# EAGLE board PCB.Board (EAGLE 9.6.2)
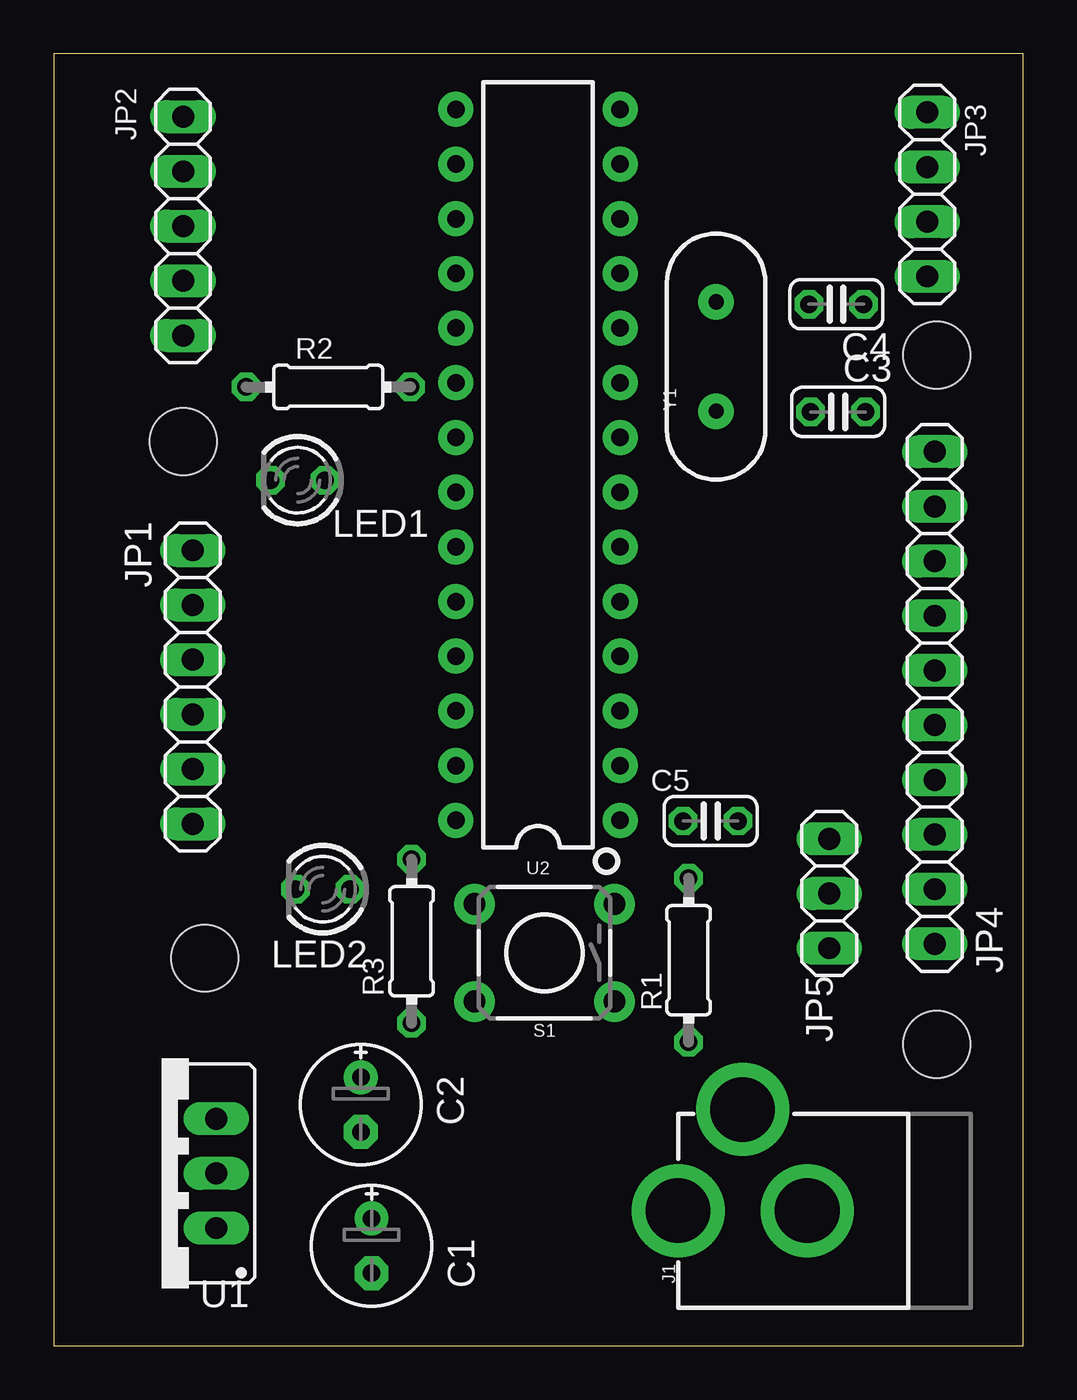
[diagram p0: board, top side]
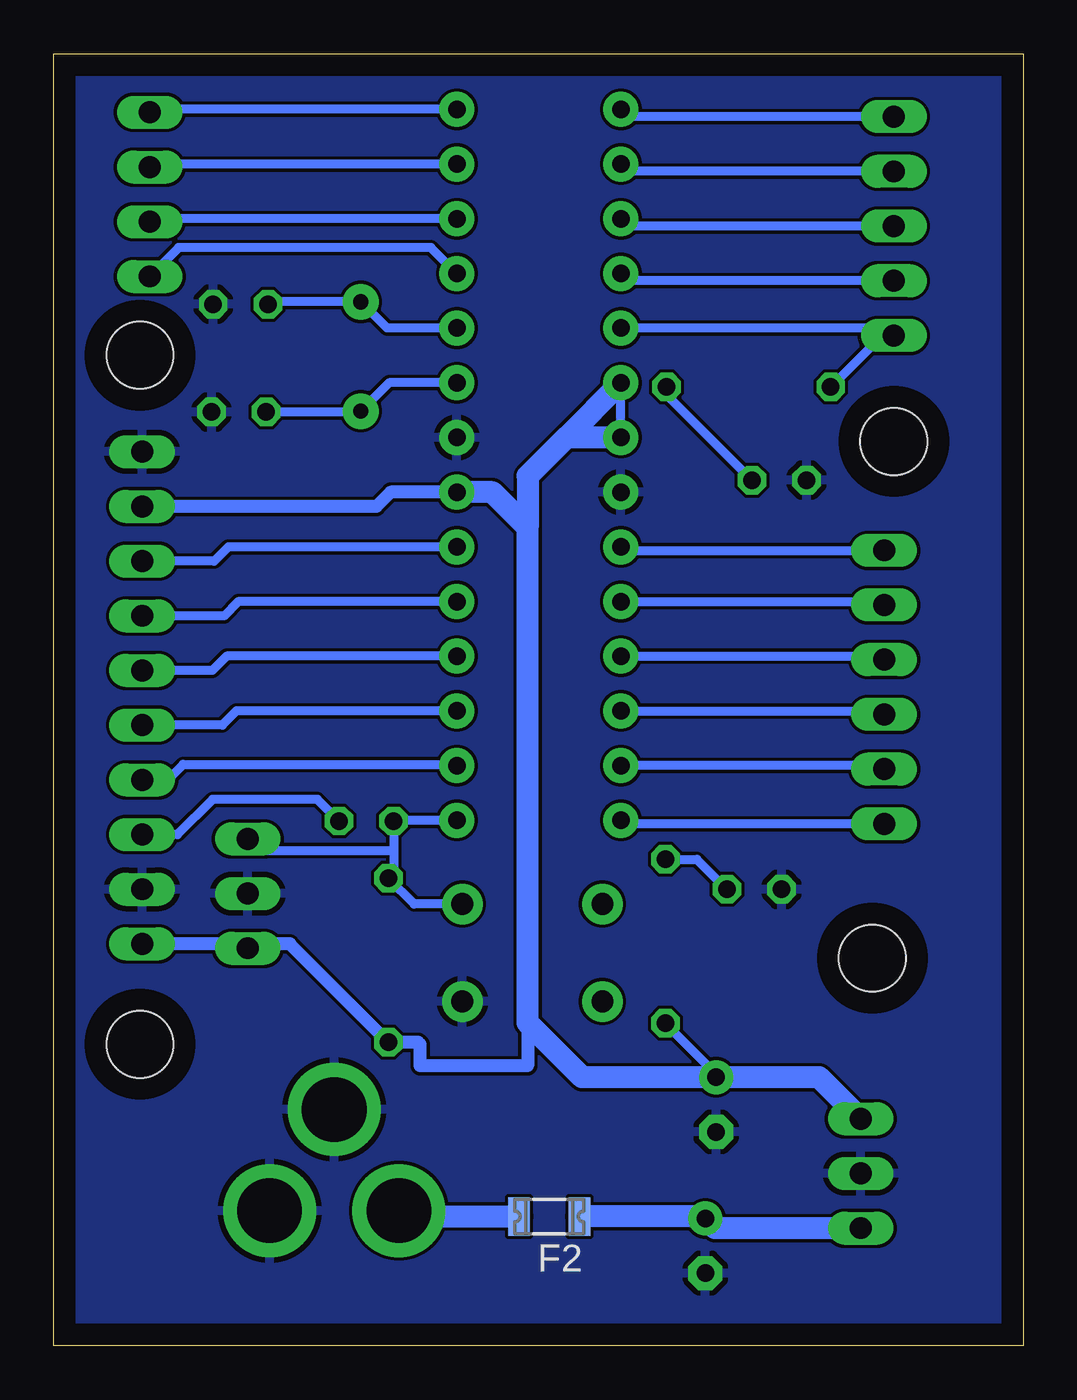
[diagram p1: board, bottom side, seen from below]

Size 45 x 60 mm. Coordinates in mm from the lower left corner, seen from the top.
Outline: 0,0 45,0 45,60 0,60 0,0
Copper layers (1*16): Top 0.035mm / dielectric 1.5mm / Bottom 0.035mm
Design rules "default": minimum track width 6mil, minimum drill 0.35mm, track to track 6mil, track to pad 6mil, pad to pad 6mil, via to via 6mil, smd to smd 6mil, copper to edge 40mil, drill to drill 6mil, minimum pad ring 10mil, minimum via ring 8mil, stop-mask expansion 4mil, vias tented up to drill 0mil, thermal gap 10mil
Holes 3.1 mm at 41,14 41,46 6,42 7,18

## Footprints (pad centres in the part's own frame; a part is rotated, then mirrored left to right if it is on the bottom)
E2,5-6E = drill 0.813 pad 1.575: + -1.27,0 | drill 0.813 pad 1.575 octagon: - 1.27,0
C025-024X044 = drill 0.813 octagon: 1 -1.27,0; 2 1.27,0
1206L = smd 1 x 1.8: 1 -1.4,0; 2 1.4,0
POWER_JACK_PTH = drill 2.997 pad 4.318: GND 0,7.7; GNDBREAK 4.7,10.7; PWR 0,13.7
1X06 = drill 1.016 long: 1 -6.35,0; 2 -3.81,0; 3 -1.27,0; 4 1.27,0; 5 3.81,0; 6 6.35,0
1X05 = drill 1.016 long: 1 -5.08,0; 2 -2.54,0; 3 0,0; 4 2.54,0; 5 5.08,0
1X04 = drill 1.016 long: 1 -3.81,0; 2 -1.27,0; 3 1.27,0; 4 3.81,0
1X10 = drill 1.016 long: 1 -11.43,0; 2 -8.89,0; 3 -6.35,0; 4 -3.81,0; 5 -1.27,0; 6 1.27,0; 7 3.81,0; 8 6.35,0; 9 8.89,0; 10 11.43,0
1X03 = drill 1.016 long: 1 -2.54,0; 2 0,0; 3 2.54,0
LED3MM = drill 0.813 octagon: A -1.27,0; K 1.27,0
0204/7 = drill 0.813 octagon: 1 -3.81,0; 2 3.81,0
TACTILE_SWITCH_PTH_6.0MM = drill 1.016 pad 1.88: 1 -3.251,2.261; 2 3.251,2.261; 3 -3.251,-2.261; 4 3.251,-2.261
78XXS = drill 1.016 long: GND 0,-2.54; IN -2.54,-2.54; OUT 2.54,-2.54
DIP28 = drill 0.813 pad 1.626: 1 -16.51,-3.81; 2 -13.97,-3.81; 3 -11.43,-3.81; 4 -8.89,-3.81; 5 -6.35,-3.81; 6 -3.81,-3.81; 7 -1.27,-3.81; 8 1.27,-3.81; 9 3.81,-3.81; 10 6.35,-3.81; 11 8.89,-3.81; 12 11.43,-3.81; 13 13.97,-3.81; 14 16.51,-3.81; 15 16.51,3.81; 16 13.97,3.81; 17 11.43,3.81; 18 8.89,3.81; 19 6.35,3.81; 20 3.81,3.81; 21 1.27,3.81; 22 -1.27,3.81; 23 -3.81,3.81; 24 -6.35,3.81; 25 -8.89,3.81; 26 -11.43,3.81; 27 -13.97,3.81; 28 -16.51,3.81
HC49US = drill 0.7 pad 1.651: 1 -2.54,0; 2 2.54,0

## Placement (x,y rotation side)
C1  10uf  [E2,5-6E]  14.75,4.64 270 top
C2  10uf  [E2,5-6E]  14.25,11.2 270 top
C3  22pf  [C025-024X044]  36.41,43.37 0 top
C4  22pf  [C025-024X044]  36.33,48.37 0 top
C5  0.1uf  [C025-024X044]  30.49,24.37 0 top
F2  1206L075/16  [1206L]  22,6 180 bottom
J1  POWER_JACK  [POWER_JACK_PTH]  42.68,6.27 90 top
JP1  [1X06]  6.45,30.59 270 top
JP2  [1X05]  6,52 270 top
JP3  [1X04]  40.55,53.47 90 top
JP4  [1X10]  40.9,30.09 90 top
JP5  [1X03]  36,21 90 top
LED1  Green  [LED3MM]  11.32,40.2 180 top
LED2  Red  [LED3MM]  12.48,21.2 180 top
R1  10k  [0204/7]  29.47,17.9 270 top
R2  220E  [0204/7]  12.74,44.53 0 top
R3  220E  [0204/7]  16.61,18.78 90 top
S1  SPST  [TACTILE_SWITCH_PTH_6.0MM]  22.78,18.25 180 top
U1  7805  [78XXS]  5,8 90 top
U2  328P  [DIP28]  22.48,40.91 90 top
Y1  16MHz  [HC49US]  30.75,45.94 270 top

## Library data of the parts
C1-C5 = rcl; SPICEPREFIX: C
F2 = polyfuse-smd_20; MF: Littelfuse; MPN: 1206L075/16; OC_FARNELL: unknown; OC_NEWARK: unknown
J1 = SparkFun-Connectors; PROD_ID: CONN-08197
JP1-JP5 = pinhead
LED1 LED2 = led
R1-R3 = rcl; SPICEPREFIX: R
S1 = SparkFun-Switches; PROD_ID: SWCH-08441; SF_SKU: COM-00097
U1 = v-reg
U2 = SparkFun-IC-Microcontroller; PROD_ID: IC-09136
Y1 = SparkFun-Clocks; PROD_ID: XTAL-08181; SF_ID: COM-00536

## Nets
!RESET: C5.1 JP5.3 R1.1 S1.3 U2.1
A0: JP1.1 U2.23
A1: JP1.2 U2.24
A2: JP1.3 U2.25
A3: JP1.4 U2.26
A4: JP1.5 U2.27
A5: JP1.6 U2.28
D2: JP4.6 U2.4
D3: JP4.7 U2.5
D4: JP4.8 U2.6
D5: JP3.1 U2.11
D6: JP3.2 U2.12
D7: JP3.3 U2.13
D8: JP3.4 U2.14
D9: JP2.1 U2.15
D10: JP2.2 U2.16
D11: JP2.3 U2.17
D12: JP2.4 U2.18
D13: JP2.5 R2.1 U2.19
DTR: C5.2 JP4.3
GND: C1.- C2.- C3.2 C4.2 J1.GND J1.GNDBREAK JP4.2 JP4.10 JP5.2 LED1.K LED2.K S1.1 U1.GND U2.8 U2.22
N$1: C1.+ F2.1 U1.IN
N$3: C3.1 U2.9 Y1.2
N$4: C4.1 U2.10 Y1.1
N$5: LED1.A R2.2
N$6: LED2.A R3.2
N$7: F2.2 J1.PWR
RX: JP4.4 U2.2
TX: JP4.5 U2.3
VCC: C2.+ JP4.1 JP4.9 JP5.1 R1.2 R3.1 U1.OUT U2.7 U2.20 U2.21

## Tracks (layer width: path | path; a pad name or v marks a point on that pad's centre or on a via)
!RESET
  Bottom 0.305: JP5.3 35.46,23
  Bottom 0.406: U2.1 29.19,24.4 C5.1 29.22,23 | 29.22,23 29.22,21.96 R1.1 28.27,20.51 S1.3 | 35.46,23 29.22,23
A0
  Bottom 0.406: U2.23 18.51,36.94 JP1.1
A1
  Bottom 0.406: U2.24 6.61,34.56 JP1.2
A2
  Bottom 0.406: U2.25 6.61,32.02 JP1.3
A3
  Bottom 0.406: U2.26 6.61,29.48 JP1.4
A4
  Bottom 0.406: JP1.5 6.61,26.94 U2.27
A5
  Bottom 0.406: JP1.6 18.51,24.24 U2.28
D2
  Bottom 0.406: U2.4 36.98,32.02 37.64,31.36 JP4.6
D3
  Bottom 0.406: U2.5 36.44,34.56 37.1,33.9 JP4.7
D4
  Bottom 0.406: U2.6 36.9,37.1 37.56,36.44 JP4.8
D5
  Bottom 0.406: U2.11 27.49,51 39.21,51 JP3.1
D6
  Bottom 0.406: U2.12 40.41,52.34 JP3.2
D7
  Bottom 0.406: U2.13 40.41,54.88 JP3.3
D8
  Bottom 0.406: U2.14 40.41,57.42 JP3.4
D9
  Bottom 0.406: JP2.1 18.33,57.08 U2.15
D10
  Bottom 0.406: JP2.2 18.33,54.54 U2.16
D11
  Bottom 0.406: JP2.3 18.33,52 U2.17
D12
  Bottom 0.406: JP2.4 18.33,49.46 U2.18
D13
  Bottom 0.406: U2.19 6.34,47.26 JP2.5 6.54,46.92 R2.1
DTR
  Bottom 0.406: C5.2 32.76,25.37 37.63,25.37 39.26,23.74 JP4.3
GND
  pour Bottom: 0,0 45,0 45,60 0,60
  pour Bottom: 0,0 45,0 45,60 0,60
N$1
  Bottom 1.016: U1.IN 14.3,5.46 C1.+ 14.84,6 F2.1
N$3
  Bottom 0.406: U2.9 29.43,44.72 Y1.2 30.78,43.37 C3.1
N$4
  Bottom 0.406: U2.10 29.53,47.26 Y1.1 34.95,48.48 C4.1
N$5
  Bottom 0.406: LED1.A 16.55,44.16 R2.2
N$6
  Bottom 0.406: R3.2 15.14,22.59 LED2.A
N$7
  Bottom 1.016: F2.2 29,6 29,6.25 J1.PWR
RX
  Bottom 0.406: JP4.4 39.72,26.28 39,27 26.35,27 U2.2
TX
  Bottom 0.406: U2.3 36.52,29.48 37.18,28.82 JP4.5
VCC
  Bottom 0.406: R3.1 14.25,12.61 C2.+ | 36,18 JP5.1 36.2,18.66 | U2.21 U2.20
  Bottom 0.61: JP4.9 30.02,38.98 29.36,39.64 U2.7 | JP4.1 36.2,18.66 34.04,18.66 R1.2 28.09,14.09 28,14 28,13 23,13 23,15
  Bottom 1.016: U1.OUT 9.47,12.47 C2.+ 20.47,12.47 23,15 23,38 | U2.7 24.64,39.64 23,38 | U2.20 21.21,42.18 | 23,38 23,40.39 21.7,41.7 21.21,42.18 | U2.21 21.21,42.18

## Text on the board
tValues: D9/PB1 | D8/PB0 | D7/PD7 | D10/PB2 | D11/PB3/MOSI | D6/PD6 | D5/PD5 | D12/PB4/MISO | D13/PB5/SCK | GND | VCC | A0/PC0 | D4/PD4 | A1/PC1 | D3/PD3/INT1 | A2/PC2 | D2/PD2/INT0 | A3/PC3 | A3/PC3 | TXD/PD1 | A4/PC4/SDA | RXD/PD0 | A5/PC5/SCL | !RESET | DTR | @princy | GND | INPUT VOLTAGE / 7V TO 16V | basicDuino / V1.0.0 / 08-04-2023